# Altium PCB poll_anlysr_pcb.PcbDoc
Units mm, origin at the board's own origin, x right, y up, seen from the top; angles counter-clockwise.
Board outline 89.28 x 101.35 mm, 2 copper layers (Top Layer, Bottom Layer); 11 components, 18 nets, 84 pads, 8 vias.
Unrouted connection lines stored in the file: 4.
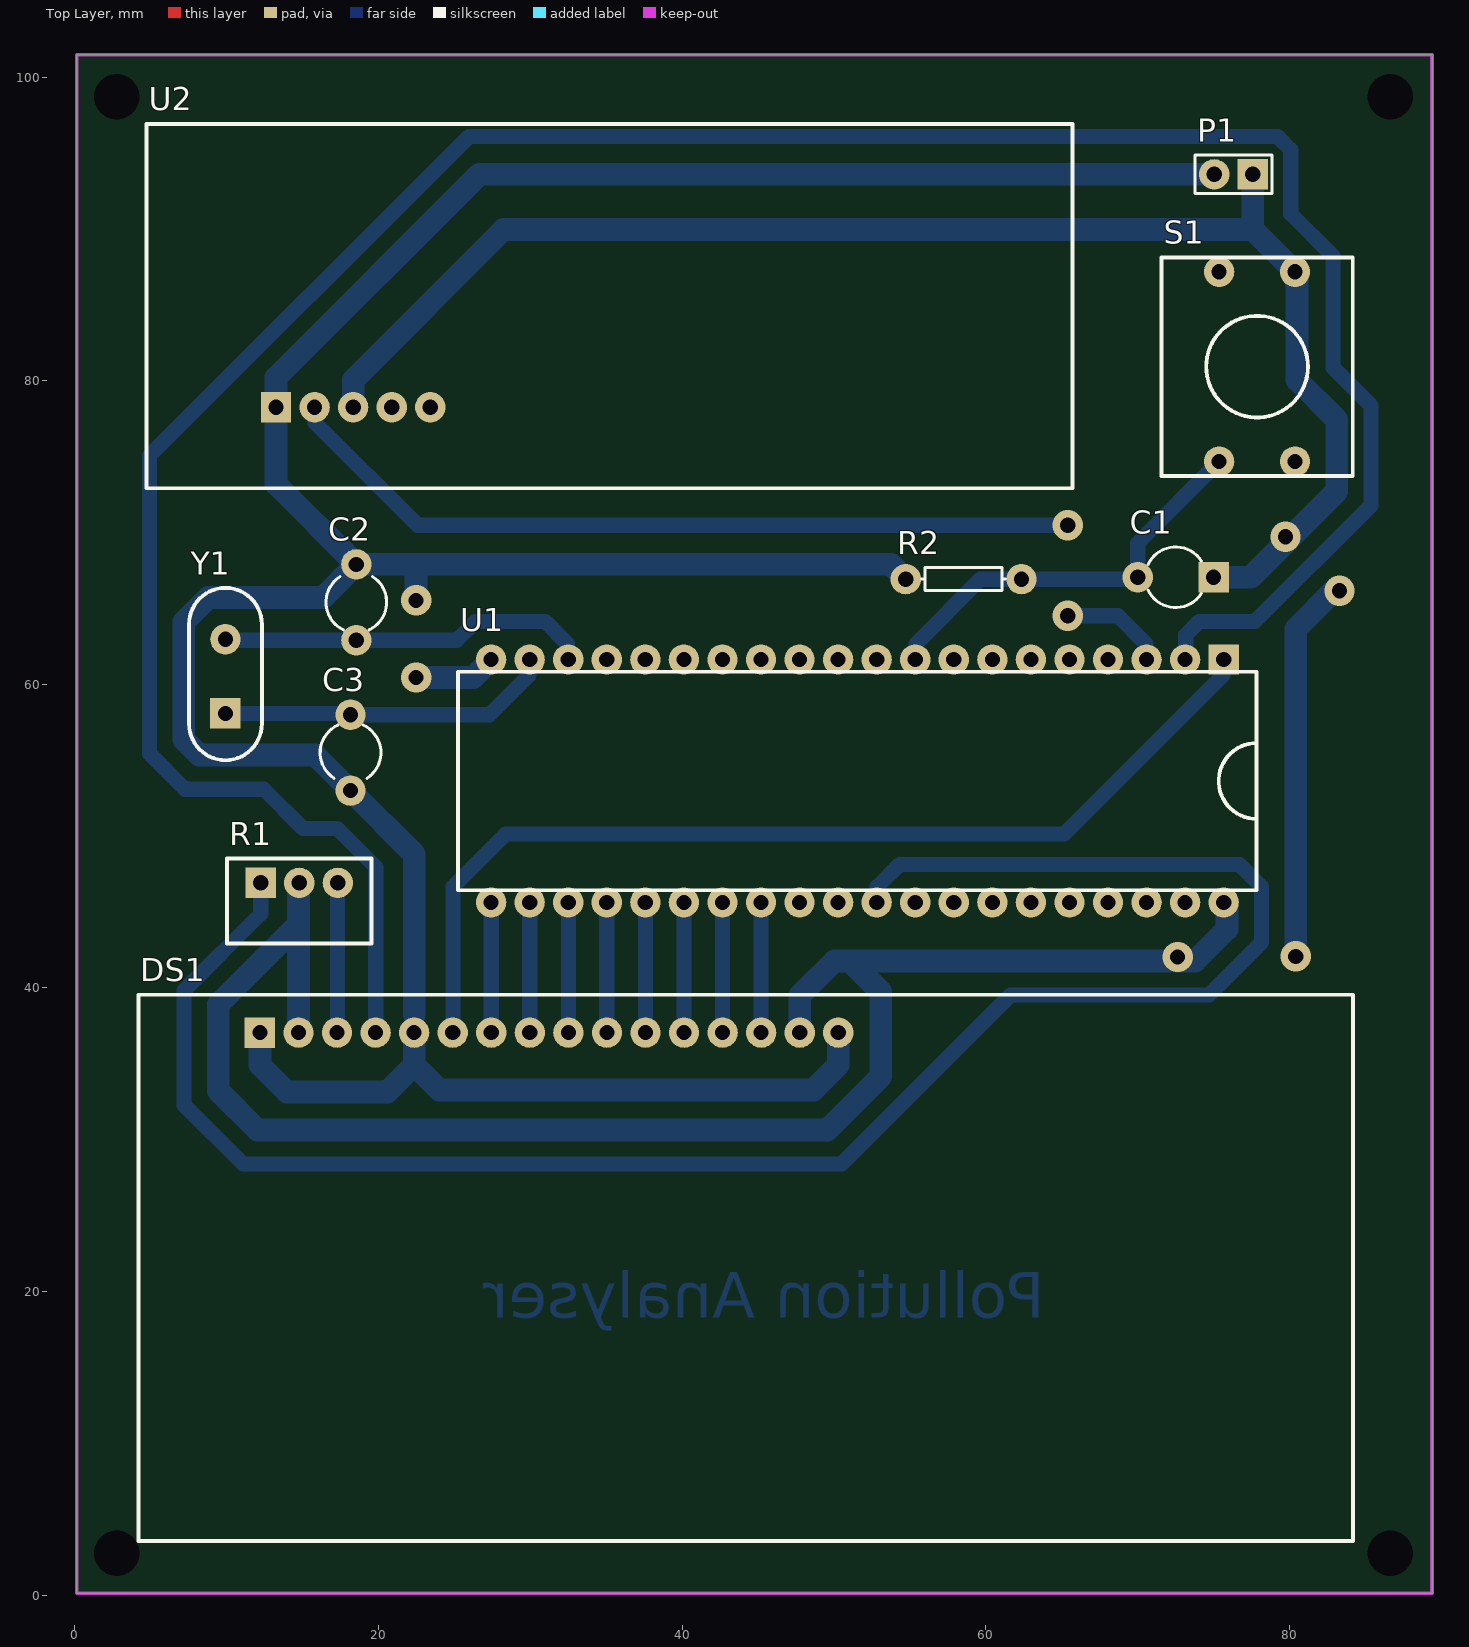
[diagram p0: Top Layer view]
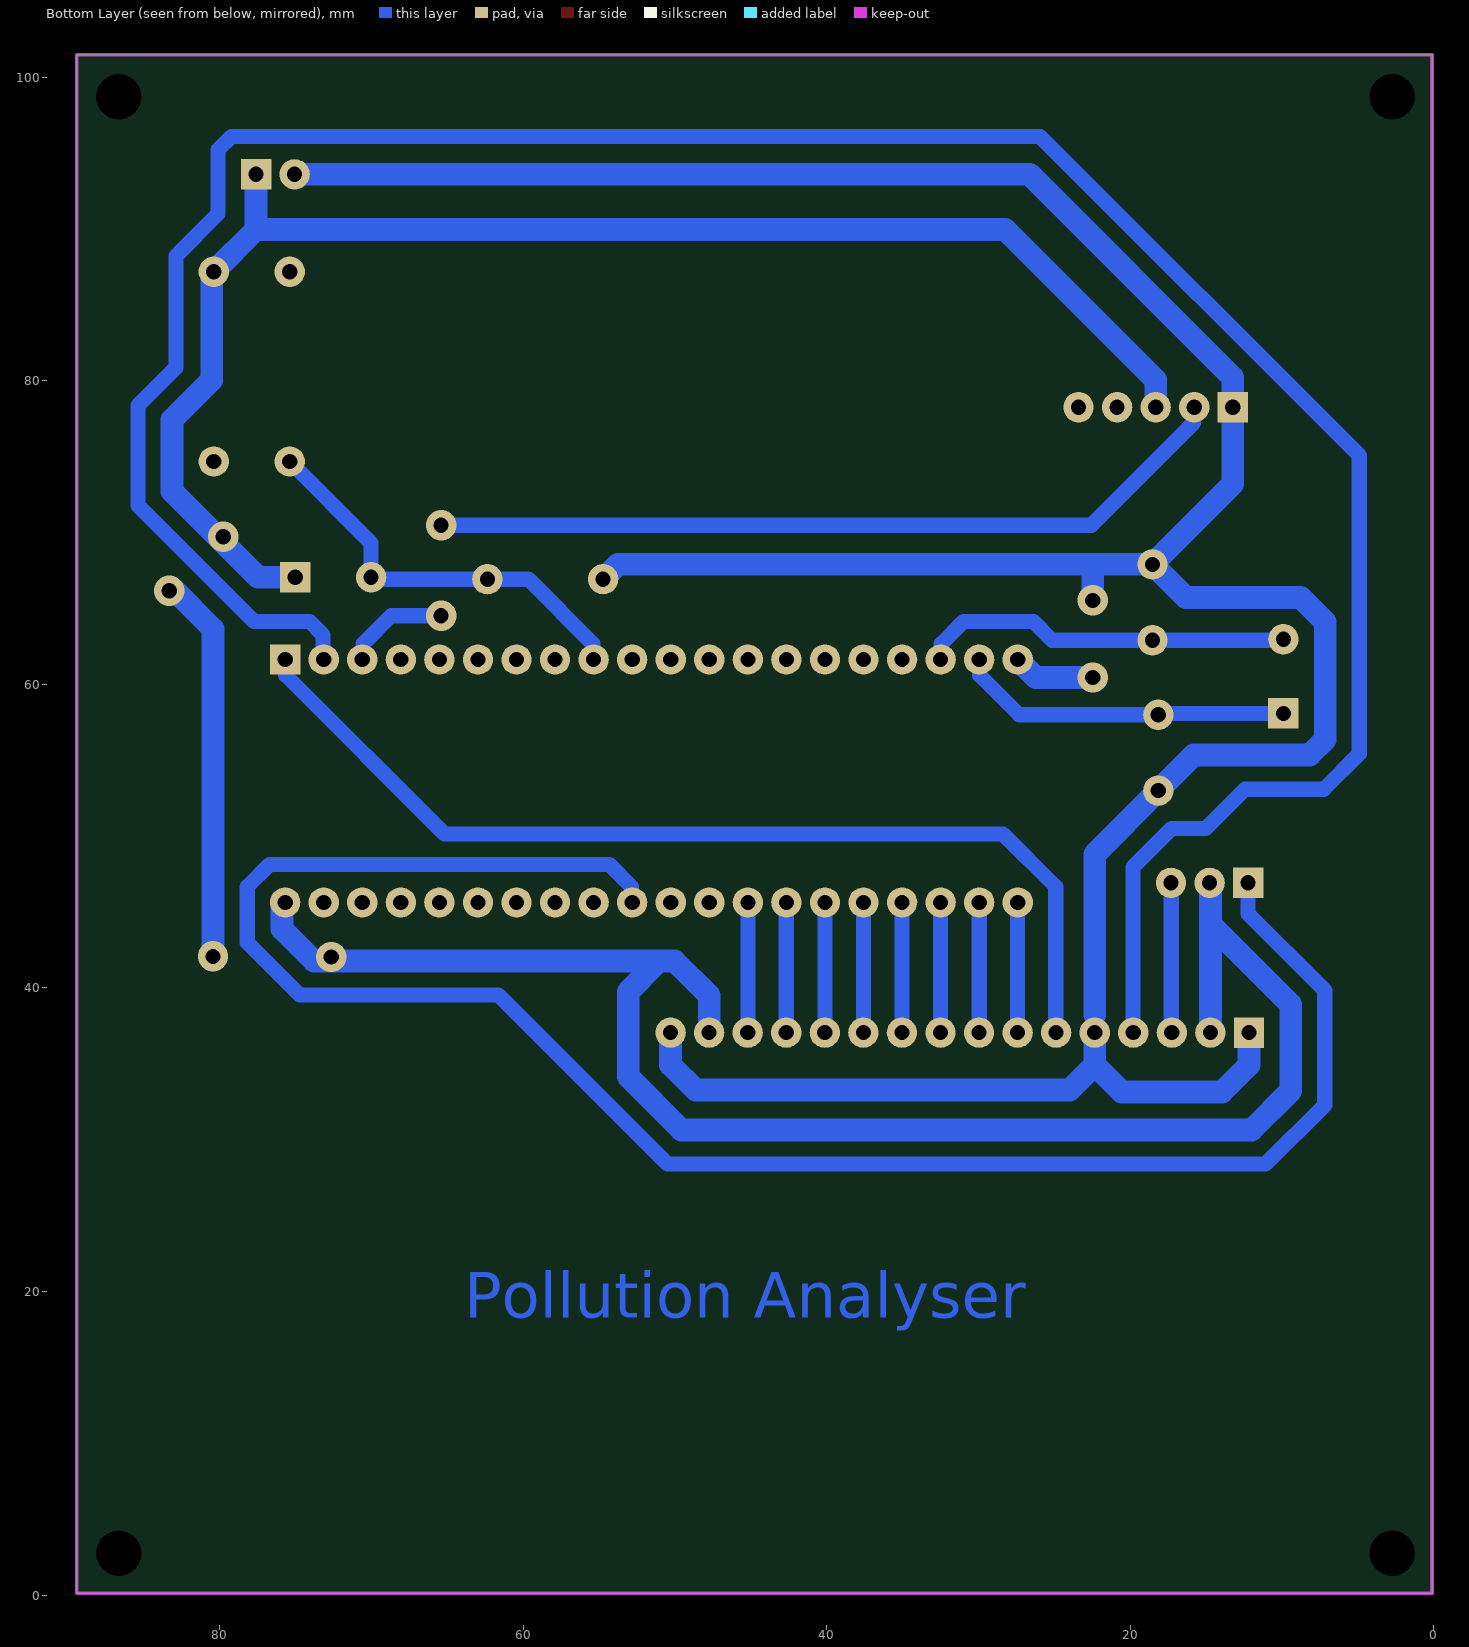
[diagram p1: Bottom Layer view, seen from below]

## Layer stack, top to bottom
Top Layer: signal copper 0.0356
Dielectric: dielectric 0.32, FR-4, Dk 4.8
Bottom Layer: signal copper 0.0356

## Board outline
0.127,0.127 89.408,0.127 89.408,101.473 0.127,101.473

## Design rules (kind name [scope] priority, off if disabled: settings)
Clearance [All] p1: gap=0.54
PolygonConnect [All] p1: connectstyle=Relief reliefconductorwidth=0.254 reliefentries=4 polygonreliefangle="90 Angle"
RoutingLayers [All] p1: top layer_v5=FALSE bottom layer_v5=TRUE
RoutingVias [All] p1: holewidth=1 width=2 viastyle="Through Hole" minholewidth=1 minwidth=2 maxholewidth=1 maxwidth=2
SilkscreenOverComponentPads [All] p1: minsilkscreentomaskgap=0.254
SolderMaskExpansion [All] p1 off: expansion=0.102
Width "Schematic Width Constraint_1" [InNet('VCC')] p1: maxlimit=1.5 minlimit=1.5 preferedwidth=1.5
Width "Schematic Width Constraint" [InNet('GND')] p2: maxlimit=1.5 minlimit=1.5 preferedwidth=1.5
Width [All] p3: maxlimit=1 minlimit=1 preferedwidth=1
26 further rules are at their usual default settings.

## Components (designator, comment, footprint, x,y, rotation, side; value= is the part's Value field where it differs from the comment)
C1 "Cap Pol1" CAPR5-4X5#1 72.517,67.056 r180 top
C2 "Cap" CAPR5-4X5#2 18.542,65.405 r270 top
C3 "Cap" CAPR5-4X5#2 18.161,55.499 r90 top
DS1 "LCD16x2" LCD_16x2 4.191,3.556 r0 top
P1 "+5V, GND" HDR1X2 77.597,93.599 r180 top
R1 "RPot" Rpot 10.033,42.926 r0 top
R2 "Res1" AXIAL-0.3 58.547,66.929 r180 top
S1 "SW-PB" SWpush 71.882,74.93 r0 top
U1 "AT89C51" AT89C51 77.851,60.833 r180 top
U2 "PPD42NS" PPD42NS 5.715,73.914 r0 top (schematic designator A1)
Y1 "11.0952MHz" HC-49U 12.319,57.404 r90 top

## Footprints (in the part's own frame and the unit in brackets; to place one, negate y for a bottom-side part, rotate by r counter-clockwise, add the part's x,y. Pads: shape width x height; smd on the part's side, far side on the other; paste and mask are expansions set on the pad)
AT89C51 [mm]
  rect 2x2 hole 1 mask+0: 1(2.17,-0.8)
  round 2 hole 1 mask+0: 2(4.71,-0.8) 3(7.25,-0.8) 4(9.79,-0.8) 5(12.33,-0.8) 6(14.87,-0.8) 7(17.41,-0.8) 8(19.95,-0.8) 9(22.49,-0.8) 10(25.03,-0.8) 11(27.57,-0.8) 12(30.11,-0.8) 13(32.65,-0.8) 14(35.19,-0.8) 15(37.73,-0.8) 16(40.27,-0.8) 17(42.81,-0.8) 18(45.35,-0.8) 20(50.43,-0.8) 21(50.43,15.2) 23(45.35,15.2) 24(42.81,15.2) 25(40.27,15.2) 26(37.73,15.2) 27(35.19,15.2) 28(32.65,15.2) 29(30.11,15.2) 31(25.03,15.2) 32(22.49,15.2) 33(19.95,15.2) 34(17.41,15.2) 36(12.33,15.2) 37(9.79,15.2) 38(7.25,15.2) 39(4.71,15.2) 40(2.17,15.2)
  round 2 hole 1 paste+0 mask+0: 19(47.89,-0.8) 22(47.89,15.2) 30(27.57,15.2) 35(14.87,15.2)
  silkscreen extent 0,0 52.6,14.4
AXIAL-0.3 [mm] "Axial Device, Thru-Hole; 2 Leads; 0.3 in Pin Spacing"
  round 2 hole 1 mask+0: 1(-3.81,0) 2(3.81,0)
  silkscreen extent -2.77,-0.76 2.77,0.76
CAPR5-4X5#1 [mm] "Capacitor; 2 Leads"
  rect 2x2 hole 1 mask+0: 1(-2.5,0)
  round 2 hole 1 mask+0: 2(2.5,0)
  silkscreen extent -1.69,-2 1.82,2
CAPR5-4X5#2 [mm] "Capacitor; 2 Leads"
  round 2 hole 1 mask+0: 1(-2.5,0) 2(2.5,0)
  silkscreen extent -1.69,-2 1.82,2
HC-49U [mm]
  rect 2x2 hole 1 mask+0: 1(0.685,2.4)
  round 2 hole 1 mask+0: 2(5.565,2.4)
  silkscreen extent -2.4,0 8.95,4.8
HDR1X2 [mm] "Connector; Header; 2 Position"
  rect 2x2 hole 1 mask+0: 1(0,0)
  round 2 hole 1 mask+0: 2(2.54,0)
  silkscreen extent -1.27,-1.27 3.81,1.27
LCD_16x2 [mm]
  rect 2x2 hole 1 mask+0: 1(8,33.5)
  round 2 hole 1 mask+0: 2(10.54,33.5) 3(13.08,33.5) 4(15.62,33.5) 5(18.16,33.5) 6(20.7,33.5) 7(23.24,33.5) 8(25.78,33.5) 9(28.32,33.5) 10(30.86,33.5) 11(33.4,33.5) 12(35.94,33.5) 13(38.48,33.5) 14(41.02,33.5) 15(43.56,33.5) 16(46.1,33.5)
  silkscreen extent 0,0 80,36
PPD42NS [mm]
  rect 2x2 hole 1 mask+0: 1(7.54,4.34)
  round 2 hole 1 mask+0: 2(10.08,4.34) 3(12.62,4.34) 4(15.16,4.34) 5(17.7,4.34)
  silkscreen extent -1,-1 60,23
Rpot [mm] "Trim potentiometer"
  rect 2x2 hole 1 mask+0: 1(2.21,4)
  round 2 hole 1 mask+0: 2(4.75,4) 3(7.29,4)
  silkscreen extent 0,0 9.5,5.6
SWpush [mm]
  round 2 hole 1 mask+0: 1(3.5,-0.25) 2(8.5,-0.25) 3(3.5,12.25) 4(8.5,12.25)
  silkscreen extent -0.3,-1.2 12.3,13.2

## Part data
C1: "Polarized Capacitor"
C2 C3: "Capacitor"
DS1: "Dsiplay"
P1: library part "Header 2", "2-Pin Header"
R1: "Potentiometer"
R2: "Resistor"
S1: "Switch"
U1: "8-bit uC"
U2: "Dust Sensor"
Y1: library part XTAL, "Crystal Oscillator"

## Free pads (board coordinates)
  round 1.524 hole 3 paste+0 mask+0: ""(2.75,2.75)
  round 1.524 hole 3 mask+0: ""(2.75,98.723) ""(86.658,2.75) ""(86.658,98.723)

## Via types
v1: diameter 2, hole 1, Top Layer to Bottom Layer, 8 vias

## Nets (pads, with @x,y where several pads share a name; then routed paths per layer and width w, separated by ;. In a path a pad name is that pad's centre, name@x,y a point inside that pad or via, vN(x,y) a via of type N, cw(c..) or ccw(c..) an arc to the next point about the centre after c; other vN are vias at no path point)
GND: C2.1 C3.1 DS1.1 DS1.5 DS1.16 P1.2 R2.2 U1.20 U2.1 | length 223.2
  Bottom Layer w1.5: DS1.1 12.191,34.926 13.97,33.147 20.572,33.147 22.351,34.926 ; DS1.5 22.351,34.926 ; 22.351,38.227 22.351,48.809 C3.1 15.821,55.339 8.194,55.339 7.169,56.364 7.169,64.108 8.78,65.719 16.356,65.719 C2.1 ; v1(22.479,60.452) 26.24,60.452 U1.20 ; v1(22.479,65.532) 22.479,67.905 ; DS1.16 50.291,34.926 48.639,33.274 24.003,33.274 22.351,34.926 ; R2.2 53.761,67.905 22.479,67.905 ; P1.2 26.637,93.599 13.255,80.217 U2.1 13.255,73.192 C2.1 ; C2.1 22.479,67.905
NetC1_2: C1.2 R2.1 S1.1 U1.9 | length 27.1
  Bottom Layer w1: U1.9@55.401,61.673 55.401,62.669 59.661,66.929 R2.1 C1.2@69.89,66.929 ; C1.2 70.017,69.315 S1.1
NetC2_2: C2.2 U1.18 Y1.2 | length 24.7
  Bottom Layer w1: Y1.2 9.983,62.905 C2.2 25.157,62.905 26.385,64.133 30.997,64.133 32.461,62.669 U1.18@32.461,61.673
NetC3_2: C3.2 U1.19 Y1.1 | length 22
  Bottom Layer w1: Y1.1 C3.2@18.071,58.089 ; C3.2 27.323,57.999 29.921,60.597 U1.19@29.921,61.593
NetDS1_3: DS1.3 R1.3 | length 9.8
  Bottom Layer w1: DS1.3@17.311,37.096 17.311,46.914 R1.3
NetDS1_4: DS1.4 U1.2 | length 175.7
  Bottom Layer w1: DS1.4 19.823,37.068 19.823,47.962 17.286,50.499 15.036,50.499 12.446,53.089 7.262,53.089 4.919,55.432 4.919,75.063 25.955,96.099 79.218,96.099 80.097,95.22 80.097,91.001 82.882,88.216 82.882,80.862 85.382,78.362 85.382,71.786 77.729,64.133 74.06,64.133 73.181,63.254 U1.2@73.181,61.673
NetDS1_6: DS1.6 U1.1 | length 67.1
  Bottom Layer w1: DS1.6 24.921,37.086 24.921,46.669 28.385,50.133 65.176,50.133 75.641,60.597 U1.1@75.641,61.593
NetDS1_7: DS1.7 U1.21 | length 8.6
  Bottom Layer w1: DS1.7 U1.21@27.431,45.623
NetDS1_8: DS1.8 U1.22 | length 8.6
  Bottom Layer w1: DS1.8@29.961,37.066 U1.22
NetDS1_9: DS1.9 U1.23 | length 8.6
  Bottom Layer w1: DS1.9 U1.23@32.511,45.623
NetDS1_10: DS1.10 U1.24 | length 8.6
  Bottom Layer w1: DS1.10@35.041,37.066 U1.24
NetDS1_11: DS1.11 U1.25 | length 8.6
  Bottom Layer w1: DS1.11 U1.25@37.591,45.623
NetDS1_12: DS1.12 U1.26 | length 8.6
  Bottom Layer w1: DS1.12@40.121,37.066 U1.26
NetDS1_13: DS1.13 U1.27 | length 8.6
  Bottom Layer w1: DS1.13 U1.27@42.671,45.623
NetDS1_14: DS1.14 U1.28 | length 8.6
  Bottom Layer w1: DS1.14@45.201,37.066 U1.28
NetR1_1: R1.1 U1.31 | length 126.6
  Bottom Layer w1: R1.1 12.243,44.889 7.191,39.837 7.191,32.299 11.093,28.397 50.502,28.397 61.638,39.533 74.719,39.533 78.181,42.995 78.181,46.669 76.717,48.133 54.325,48.133 52.861,46.669 U1.31@52.861,45.673
NetU1_3: U1.3 U2.2 | length 60.3
  Bottom Layer w1: U2.2 15.835,78.214 15.835,77.218 22.568,70.485 v1(65.405,70.485) ; v1(65.405,64.516) 68.714,64.516 70.561,62.669 U1.3@70.561,61.673
VCC: C1.1 DS1.2 DS1.15 P1.1 R1.2 S1.4 U1.40 U2.3 | length 236.3
  Bottom Layer w1.5: DS1.2 14.731,44.195 ; R1.2@14.731,46.874 14.731,44.195 ; U2.3 18.335,80.057 28.243,89.965 77.597,89.965 ; DS1.15 47.751,39.496 50.038,41.783 51.054,41.783 ; v1(72.644,42.037) v1@72.39,41.783 ; C1.1 77.47,67.056 83.132,72.718 83.132,77.43 80.518,80.044 S1.4@80.518,87.044 ; U1.40@75.891,45.633 75.891,43.887 73.787,41.783 v1@72.39,41.783 ; P1.1 77.597,89.965 ; S1.4 77.597,89.965 ; v1(80.431,42.077) 80.431,63.653 83.001,66.224 83.255,66.224 v1(83.312,66.167) ; 14.731,44.195 9.441,38.905 9.441,33.231 12.025,30.647 49.57,30.647 53.086,34.163 53.086,39.751 51.054,41.783 ; 51.054,41.783 v1@72.39,41.783
  other v1: 79.756,69.723
pads on no net: S1.2 S1.3 U1.4 U1.5 U1.6 U1.7 U1.8 U1.10 U1.11 U1.12 U1.13 U1.14 U1.15 U1.16 U1.17 U1.29 U1.30 U1.32 U1.33 U1.34 U1.35 U1.36 U1.37 U1.38 U1.39 U2.4 U2.5

## Keep-outs
Keep-Out Layer:
  the board outline again, w0.254

## Other copper
Bottom Layer:
  text "Pollution Analyser" at 63.881,18.288 h3